# Altium PCB Brightside_Telemetry_pcb_rev2.PcbDoc (part 1 of 2)
Units mm, origin at the board's own origin, x right, y up, seen from the top; angles counter-clockwise.
Board outline 99.99 x 89.99 mm, 2 copper layers (Top Layer, Bottom Layer); 84 components, 55 nets, 357 pads, 109 vias.
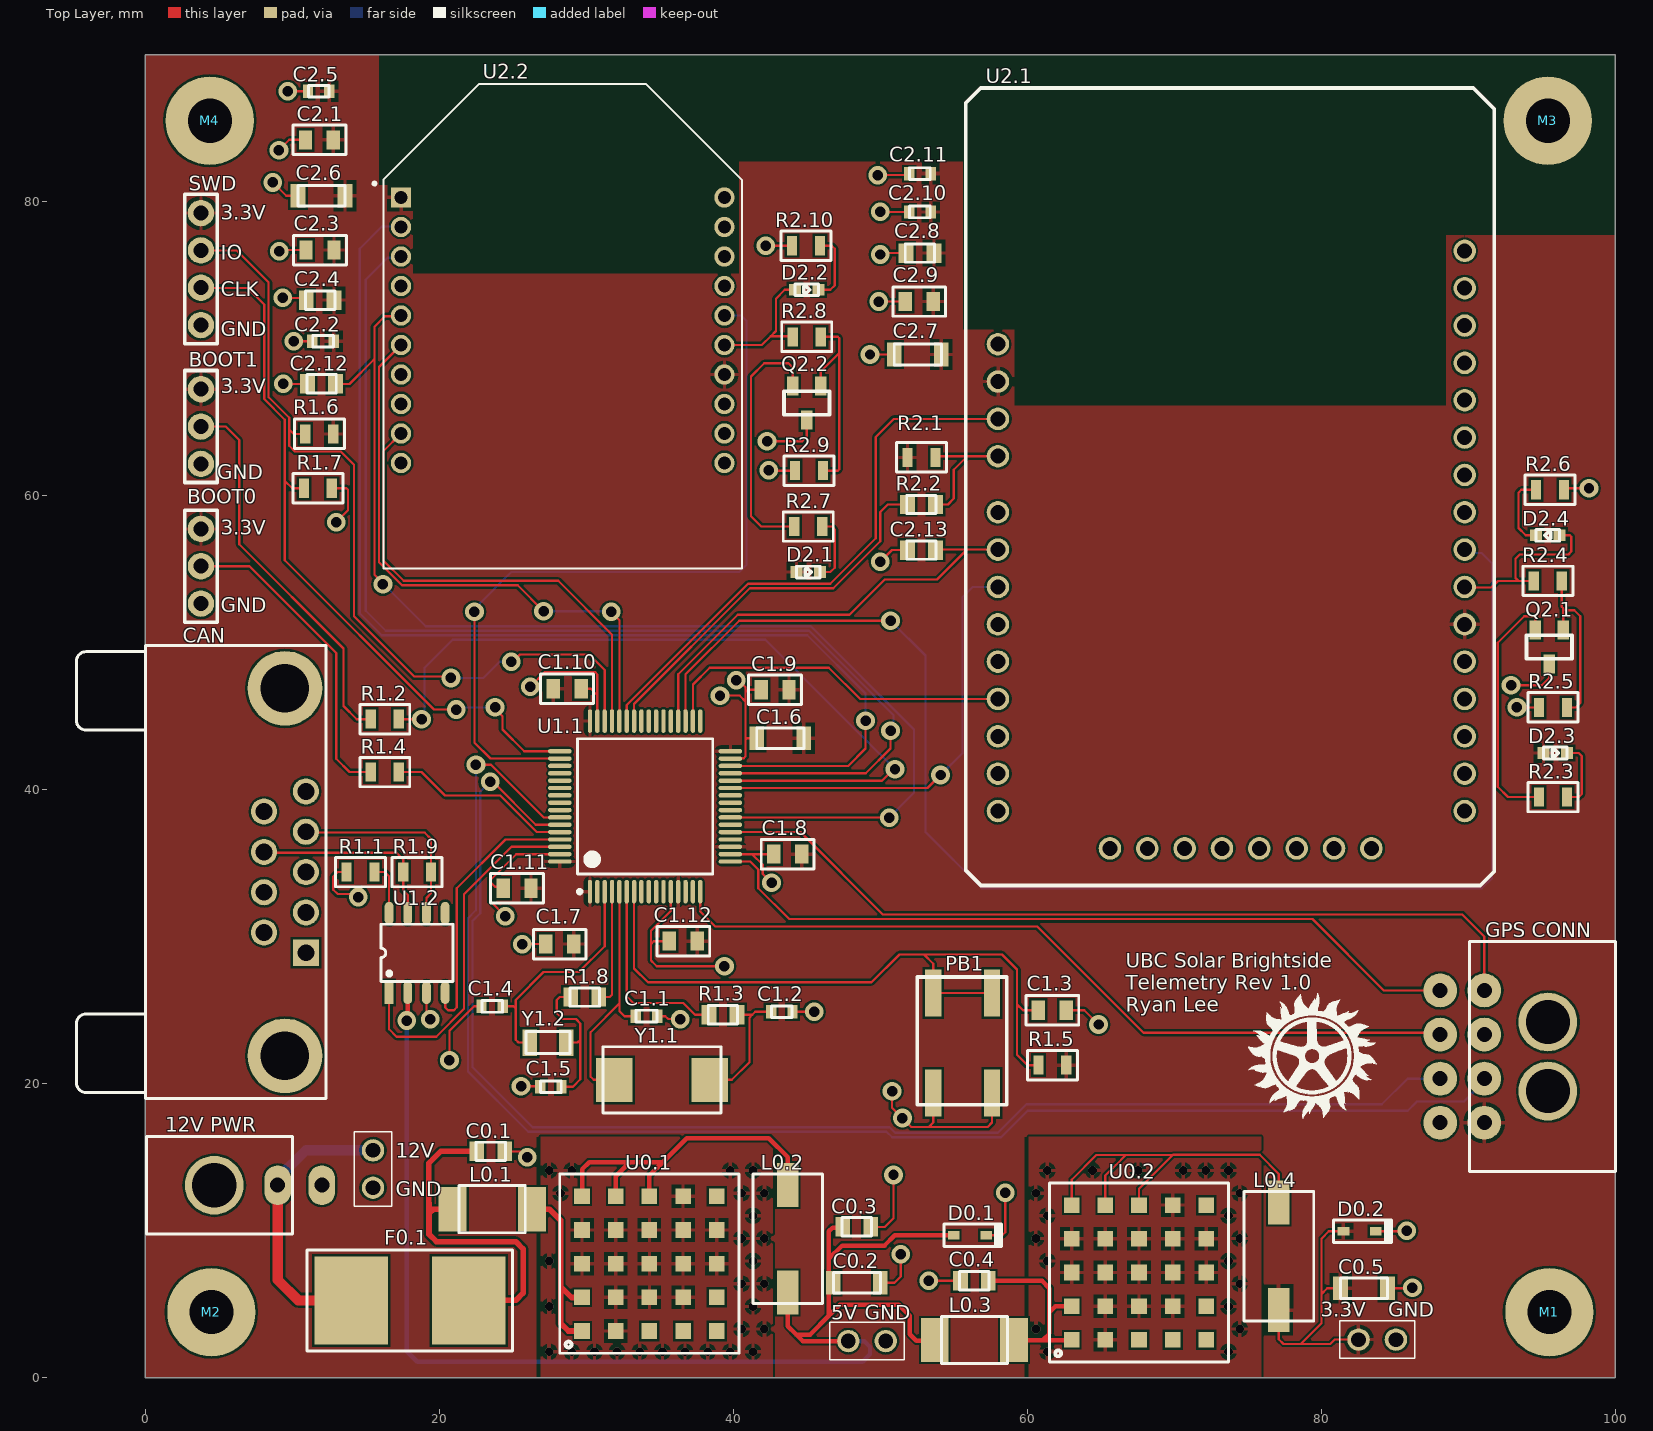
[diagram p0: Top Layer view]
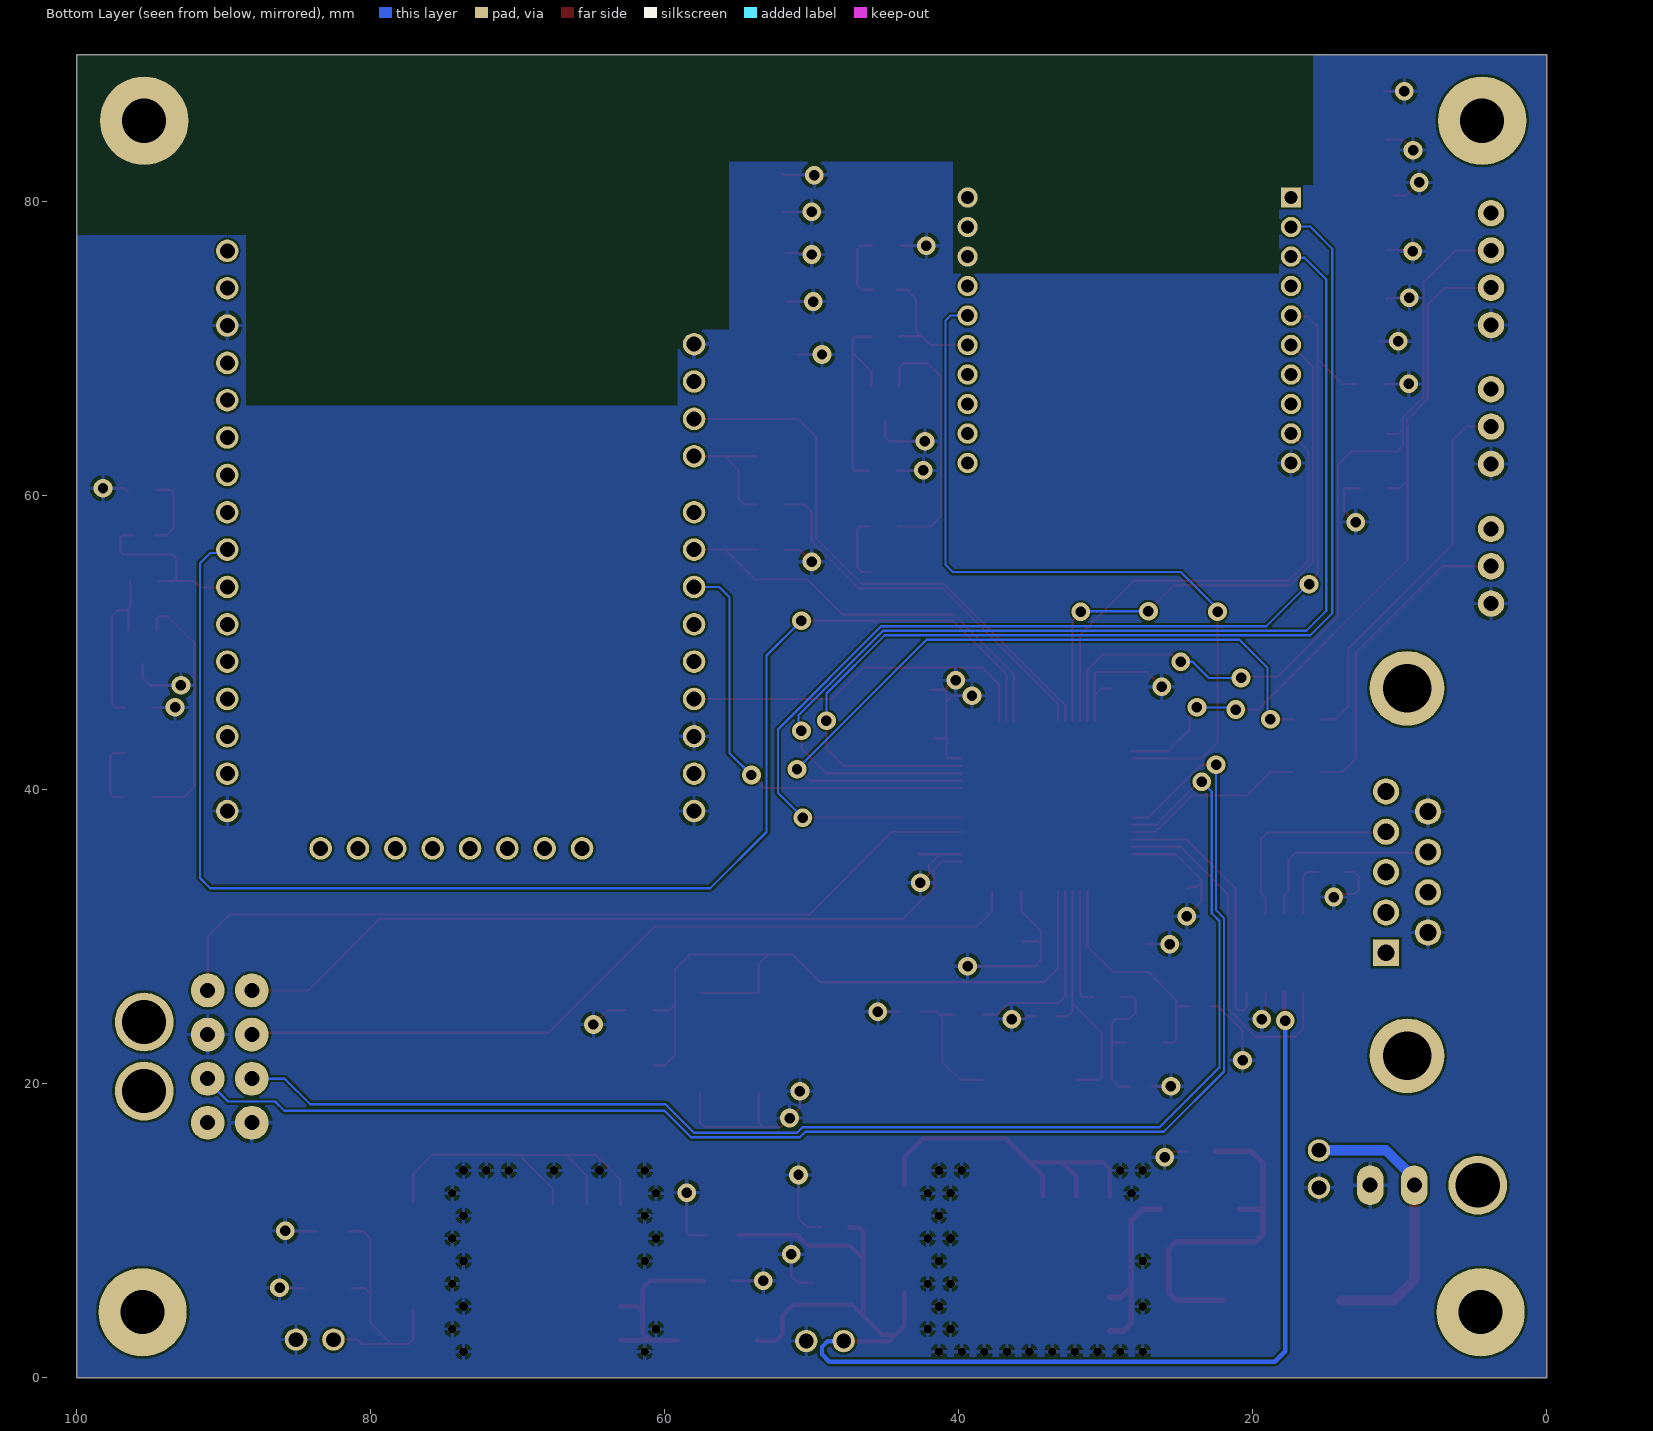
[diagram p1: Bottom Layer view, seen from below]
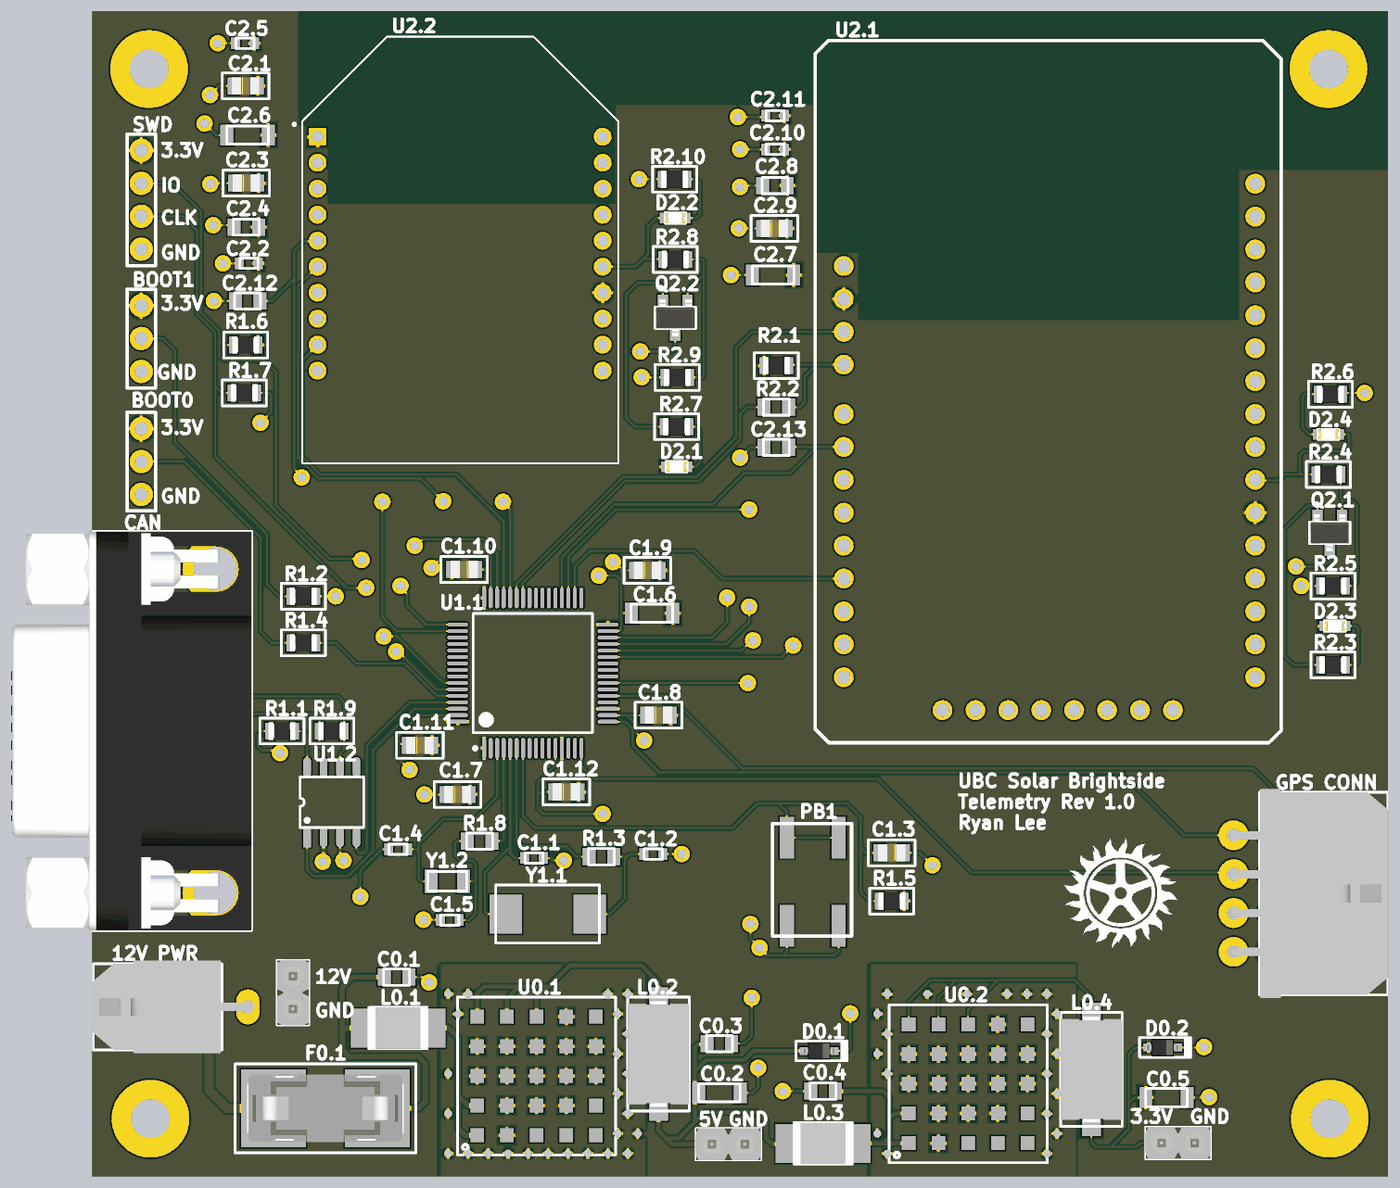
[diagram p2: 3D render of the assembled board from above, using the file's embedded part models]

## Layer stack, top to bottom
Top Solder: solder mask 0.0102, Solder Resist, Dk 3.5
Top Layer: signal copper 0.0356
Dielectric 1: dielectric 0.32, FR-4, Dk 4.8
Bottom Layer: signal copper 0.0356
Bottom Solder: solder mask 0.0102, Solder Resist, Dk 3.5

## Board outline
0,0 99.992,0 99.992,89.989 0,89.989

## Design rules (kind name [scope] priority, off if disabled: settings)
Clearance "Stitching No Net" [IsStitchingVia and InNet('No Net') vs (IsVia and (Not IsStitchingVia)) Or IsPad] p1: gap=0.127 ignorepadtopadclearanceinfootprint=FALSE
Clearance [All] p2: gap=0.152 ignorepadtopadclearanceinfootprint=FALSE
HoleSize [All] p1: absolutevalues=TRUE maxlimit=100 minlimit=0.4 maxpercent=80.000 minpercent=20.000
MinimumSolderMaskSliver [All] p1: minsoldermaskwidth=0
PolygonConnect [All] p1: connectstyle=Relief reliefconductorwidth=0.254 reliefentries=4 polygonreliefangle="90 Angle" airgapwidth=0.254
RoutingVias [All] p1: holewidth=0.4 width=0.8 viastyle="Through Hole" minholewidth=0.4 minwidth=0.6 maxholewidth=100 maxwidth=100
SilkToSilkClearance [All] p1: silktosilkclearance=0
SilkToSolderMaskClearance [IsPad] p1: minsilkscreentomaskgap=0 clearancetoexposedcopper=TRUE
SolderMaskExpansion [All] p1: expansion=0.102 istentingtop=FALSE
Width [All] p1: maxlimit=100 minlimit=0.152 preferedwidth=0.152
26 further rules are at their usual default settings.

## Classes and differential pairs
component class misc_comp: M1 M2 M3 M4
component class Brightside_Telemetry_stm_rev2: BOOT0 BOOT1 C1.1 C1.2 C1.3 C1.4 C1.5 C1.6 C1.7 C1.8 C1.9 C1.10 C1.11 C1.12 "GPS CONN" PB1 R1.1 R1.2 R1.3 R1.4 R1.5 R1.6 R1.7 R1.8 R1.9 SWD U1.1 U1.2 Y1.1 Y1.2
component class Brightside_Telemetry_RC_rev2: C2.1 C2.2 C2.3 C2.4 C2.5 C2.6 C2.7 C2.8 C2.9 C2.10 C2.11 C2.12 C2.13 D2.1 D2.2 D2.3 D2.4 Q2.1 Q2.2 R2.1 R2.2 R2.3 R2.4 R2.5 R2.6 R2.7 R2.8 R2.9 R2.10 U2.2
component class Brightside_Telemetry_power_rev2: C0.1 C0.2 C0.3 C0.4 C0.5 D0.1 D0.2 F0.1 L0.1 L0.2 L0.3 L0.4 U0.1 U0.2

## Components (designator, comment, footprint, x,y, rotation, side; value= is the part's Value field where it differs from the comment)
"12V PWR" "G881A02001TEU" "Micro-Fit 3.0 2pos" 9.014,13.1 r270 top (schematic designator J0.4)
BOOT0 "HDR" "0.1\" Header 3pos" 3.794,55.2 r270 top (schematic designator J1.3)
BOOT1 "HDR" "0.1\" Header 3pos" 3.794,64.7 r270 top (schematic designator J1.2)
C0.1 "0.01uF" 0805 23.494,15.4 r180 top
C0.2 "22uF" 1206 48.4,6.467 r180 top
C0.3 "0.01uF" 0805 48.4,10.267 r180 top
C0.4 "0.01uF" 0805 56.394,6.6 r0 top
C0.5 "22uF" 1206 82.894,6.1 r180 top
C1.1 "6pF" 0603 34.094,24.6 r0 top
C1.2 "6pF" 0603 43.294,24.9 r0 top
C1.3 "0.1uF" C0805 61.694,25 r180 top
C1.4 "4pF" 0603 23.6,25.267 r0 top
C1.5 "4pF" 0603 27.594,19.8 r0 top
C1.6 "1uF" 1206 43.194,43.5 r180 top
C1.7 "0.1uF" C0805 28.194,29.5 r0 top
C1.8 "0.1uF" C0805 43.7,35.617 r0 top
C1.9 "0.1uF" C0805 42.844,46.8 r0 top
C1.10 "0.1uF" C0805 28.7,46.867 r180 top
C1.11 "0.1uF" C0805 25.294,33.3 r0 top
C1.12 "0.1uF" C0805 36.594,29.7 r0 top
C2.1 "1uF" C0805 11.844,84.2 r0 top
C2.2 "8.3pf" 0603 12.094,70.5 r0 top
C2.3 "10uF" C0805 11.894,76.7 r0 top
C2.4 "0.1uF" 0805 11.894,73.3 r0 top
C2.5 "47pf" 0603 11.794,87.5 r180 top
C2.6 "100uf" 1206 11.994,80.4 r0 top
C2.7 "100uf" 1206 52.544,69.6 r0 top
C2.8 "0.1uF" 0805 52.694,76.5 r180 top
C2.9 "10uF" C0805 52.644,73.2 r0 top
C2.10 "47pf" 0603 52.694,79.3 r0 top
C2.11 "8.3pf" 0603 52.694,81.9 r0 top
C2.12 "0.01uF" 0805 11.994,67.6 r180 top
C2.13 "0.01uF" 0805 52.794,56.3 r0 top
CAN "A-DF09A/KG-T2S" "DB9 (FEMALE)" 9.504,34.4 r270 top (schematic designator J1.1)
D0.1 "TVS Diode 5V" SOD-323 56.094,9.7 r180 top
D0.2 "TVS Diode 3V3" SOD-323 82.6,9.967 r180 top
D2.1 "RED" "0603 LED" 45.094,54.8 r180 top
D2.2 "RED" "0603 LED" 44.994,74 r180 top
D2.3 "GREEN" "0603 LED" 95.894,42.5 r180 top
D2.4 "GREEN" "0603 LED" 95.394,57.3 r0 top
F0.1 "Fuseholder" "SCHURTER - 0031.7701.11 - FUSE HOLDER, PCB MOUNT" 18,5.267 r0 top
"GPS CONN" "10132449-0821GLF" "Micro-Fit 3.0 8pos" 91.074,21.85 r90 top (schematic designator J1.4)
J0.1 "1x2 HDR100" "Molex 0901200762" 15.494,14.2 r270 top
J0.2 "1x2 HDR100" "Molex 0901200762" 49.094,2.5 r0 top
J0.3 "1x2 HDR100" "Molex 0901200762" 83.794,2.6 r0 top
L0.1 "70" 1812 23.6,11.467 r0 top
L0.2 "98" 7427932 43.7,9.467 r270 top
L0.3 "70" 1812 56.4,2.567 r0 top
L0.4 "98" 7427932 77.1,8.267 r270 top
M1 "3mm Mounting Hole" "3mm Mounting Hole" 95.5,4.467 r90 top
M2 "3mm Mounting Hole" "3mm Mounting Hole" 4.5,4.467 r90 top
M3 "3mm Mounting Hole" "3mm Mounting Hole" 95.394,85.5 r90 top
M4 "3mm Mounting Hole" "3mm Mounting Hole" 4.394,85.5 r90 top
PB1 "P12961SCT-ND" P12961SCT-ND 53.6,26.167 r270 top
Q2.1 "BJT" SOT-23-3 95.494,49.7 r180 top
Q2.2 "BJT" SOT-23-3 44.994,66.3 r180 top
R1.1 "1k" R0805 14.644,34.4 r180 top
R1.2 "10K" R0805 16.294,44.8 r180 top
R1.3 "0" 0805 39.294,24.7 r0 top
R1.4 "10K" R0805 16.294,41.2 r180 top
R1.5 "10K" R0805 61.7,21.267 r0 top
R1.6 "10K" R0805 11.844,64.2 r180 top
R1.7 "10K" R0805 11.744,60.5 r180 top
R1.8 "0" 0805 29.894,25.9 r0 top
R1.9 "120 ohm" R0805 18.494,34.4 r180 top
R2.1 "1K" R0805 52.794,62.6 r180 top
R2.2 "0" 0805 52.794,59.4 r0 top
R2.3 "464" R0805 95.744,39.5 r0 top
R2.4 "10K" R0805 95.394,54.2 r0 top
R2.5 "10K" R0805 95.744,45.6 r0 top
R2.6 "1K" R0805 95.544,60.4 r180 top
R2.7 "464" R0805 45.094,57.9 r0 top
R2.8 "10K" R0805 44.994,70.8 r0 top
R2.9 "10K" R0805 45.144,61.7 r0 top
R2.10 "1K" R0805 44.944,77 r0 top
SWD "HDR" "0.1\" Header 4pos" 3.794,75.41 r90 top (schematic designator J1.5)
U0.1 "RPM5.0-3.0" 25-BLGA 34.29,7.767 r90 top
U0.2 "RPM3.3-3.0" 25-BLGA 67.59,7.167 r90 top
U1.1 "STM32F103RCT6_SingleBlock" 64-LQFP 34,38.867 r90 top
U1.2 "MCP2551-I/SN" 8-SOIC 18.494,28.9 r90 top
U2.1 "XBEE_SMD_ADAPTER" XBEE_RF_ADAPT 74.273,57.818 r0 top
U2.2 "XBP24CAUIT-001" XBEE_RF 28.394,71.4 r0 top
Y1.1 "8MHz" NX8045GB-8.000000MHZ 35.15,20.267 r180 top
Y1.2 "32kHz" "FC-135 32.7680KA-AG" 27.394,22.8 r0 top

## Footprints (in the part's own frame and the unit in brackets; to place one, negate y for a bottom-side part, rotate by r counter-clockwise, add the part's x,y. Pads: shape width x height; smd on the part's side, far side on the other; paste and mask are expansions set on the pad)
"0.1\" Header 3pos" [mm]
  round 1.8 hole 1.02: 1(-2.54,0) 2(0,0) 3(2.54,0)
  silkscreen extent -3.81,-1.1 3.81,1.1
"0.1\" Header 4pos" [mm]
  round 1.8 hole 1.02: 1(-3.81,0) 2(-1.27,0) 3(1.27,0) 4(3.81,0)
  silkscreen extent -5.08,-1.1 5.08,1.1
"3mm Mounting Hole" [mm]
  round 6 hole 3: 1(0,0)
8-SOIC [mm]
  rect 1.55x0.6 smd: 1(-2.7,1.905)
  oval 1.55x0.6 smd: 2(-2.7,0.635) 3(-2.7,-0.635) 4(-2.7,-1.905) 5(2.7,-1.905) 6(2.7,-0.635) 7(2.7,0.635) 8(2.7,1.905)
  silkscreen extent -1.95,-2.45 1.95,2.45
25-BLGA [mm]
  rect 1.06x1.06 smd: A1(-4.58,4.58) A2(-2.29,4.58) A3(0,4.58) A4(2.29,4.58) A5(4.58,4.58) B1(-4.58,2.29) B2(-2.29,2.29) B3(0,2.29) B4(2.29,2.29) B5(4.58,2.29) C1(-4.58,0) C2(-2.29,0) C3(0,0) C4(2.29,0) C5(4.58,0) D1(-4.58,-2.29) D2(-2.29,-2.29) D3(0,-2.29) D4(2.29,-2.29) D5(4.58,-2.29) E1(-4.58,-4.58) E2(-2.29,-4.58) E3(0,-4.58) E4(2.29,-4.58) E5(4.58,-4.58)
  silkscreen extent -6.09,-6.09 6.09,6.09
64-LQFP [mm]
  oval 1.6x0.3 smd: 1(-5.8,3.75) 2(-5.8,3.25) 3(-5.8,2.75) 4(-5.8,2.25) 5(-5.8,1.75) 6(-5.8,1.25) 7(-5.8,0.75) 8(-5.8,0.25) 9(-5.8,-0.25) 10(-5.8,-0.75) 11(-5.8,-1.25) 12(-5.8,-1.75) 13(-5.8,-2.25) 14(-5.8,-2.75) 15(-5.8,-3.25) 16(-5.8,-3.75) 33(5.8,-3.75) 34(5.8,-3.25) 35(5.8,-2.75) 36(5.8,-2.25) 37(5.8,-1.75) 38(5.8,-1.25) 39(5.8,-0.75) 40(5.8,-0.25) 41(5.8,0.25) 42(5.8,0.75) 43(5.8,1.25) 44(5.8,1.75) 45(5.8,2.25) 46(5.8,2.75) 47(5.8,3.25) 48(5.8,3.75)
  oval 0.3x1.6 smd: 17(-3.75,-5.8) 18(-3.25,-5.8) 19(-2.75,-5.8) 20(-2.25,-5.8) 21(-1.75,-5.8) 22(-1.25,-5.8) 23(-0.75,-5.8) 24(-0.25,-5.8) 25(0.25,-5.8) 26(0.75,-5.8) 27(1.25,-5.8) 28(1.75,-5.8) 29(2.25,-5.8) 30(2.75,-5.8) 31(3.25,-5.8) 32(3.75,-5.8) 49(3.75,5.8) 50(3.25,5.8) 51(2.75,5.8) 52(2.25,5.8) 53(1.75,5.8) 54(1.25,5.8) 55(0.75,5.8) 56(0.25,5.8) 57(-0.25,5.8) 58(-0.75,5.8) 59(-1.25,5.8) 60(-1.75,5.8) 61(-2.25,5.8) 62(-2.75,5.8) 63(-3.25,5.8) 64(-3.75,5.8)
  silkscreen extent -5.92,-4.6 4.6,4.6, body extent -5,-5 5,5, height 1.6
0603 [mm]
  rect 0.7x0.9 smd: 1(-0.725,0) 2(0.725,0)
  silkscreen extent -0.7,-0.4 0.7,0.4
"0603 LED" [mm]
  rect 0.8x0.8 smd: 1(-0.8,0) 2(0.8,0)
  silkscreen extent -0.8,-0.4 0.8,0.4, body extent -0.8,-0.4 0.8,0.4, height 0.7
0805 [mm]
  rect 1x1.32 smd: 1(-0.95,0) 2(0.95,0)
  silkscreen extent -1,-0.63 1,0.63
1206 [mm]
  rect 1x1.6 smd: 1(-1.6,0) 2(1.6,0)
  silkscreen extent -1.6,-0.7 1.6,0.7
1812 [mm]
  rect 1.9x3 smd: 1(-2.7,0) 2(2.7,0)
  silkscreen extent -2.25,-1.6 2.25,1.6, body extent -2.25,-1.6 2.25,1.6, height 1.51
7427932 [mm]
  rect 3x1.47 smd: 1(-3.65,0) 2(3.65,0)
  silkscreen extent -4.4,-2.37 4.4,2.37, body extent -4.1,-2.38 4.1,2.37, height 3.21
C0805 [mm]
  rect 0.9x1.3 smd: 1(-0.95,0) 2(0.95,0)
  silkscreen extent -1.8,-1 1.8,1, body extent -1.05,-0.67 1.05,0.67, height 0.94
"DB9 (FEMALE)" [mil]
  rect 70x70 hole 45: 1(216,56)
  round 70 hole 45: 2(108,56) 3(0,56) 4(-108,56) 5(-216,56) 6(162,-56) 7(54,-56) 8(-54,-56) 9(-162,-56)
  round 200 hole 130: G1(492,0) G2(-492,0)
  silkscreen extent -606,-558 606,110, body extent -606,-620 606,110, height 493
"FC-135 32.7680KA-AG" [mm]
  rect 1x1.8 smd: 1(-1.25,0) 2(1.25,0)
  silkscreen extent -1.5,-0.75 1.5,0.75
"Micro-Fit 3.0 2pos" [mm]
  oval 2.7x1.8 hole 1.02: 1(0,0) 2(0,3)
  round 4 hole 3: ""(0,-4.32)
  silkscreen extent -3.32,-8.92 3.32,1, body extent -3.58,-9 3.58,3.24, height 8.78
"Micro-Fit 3.0 8pos" [mm]
  round 2.3 hole 1.02: 1(4.5,0) 2(1.5,0) 3(-1.5,0) 4(-4.5,0) 5(4.5,3) 6(1.5,3) 7(-1.5,3) 8(-4.5,3)
  round 4 hole 3: ""(-2.35,-4.32) ""(2.35,-4.32)
  silkscreen extent -7.83,-8.92 7.83,1, body extent -8.07,-8.95 8.08,3.29, height 8.78
"Molex 0901200762" [mil]
  round 60 hole 39.37: 1(-50,0) 2(50,0)
  silkscreen extent -100,-50 100,50, body extent -100,-49 100,49, height 365
NX8045GB-8.000000MHZ [mm]
  rect 2.5x3 smd: 1(-3.25,0) 2(3.25,0)
  silkscreen extent -4,-2.25 4,2.25
P12961SCT-ND [mm]
  rect 3.2x1.1 smd: 1(0,0) 2(6.8,0) 3(0,4) 4(6.8,4)
  silkscreen extent -1.1,-1.1 7.6,5
R0805 [mm]
  rect 0.7x1.3 smd: 1(-0.95,0) 2(0.95,0)
  silkscreen extent -1.7,-1 1.7,1, body extent -1.05,-0.67 1.05,0.68, height 0.6
"SCHURTER - 0031.7701.11 - FUSE HOLDER, PCB MOUNT" [mm]
  rect 5x6 smd: 1(-4,0) 2(4,0)
  silkscreen extent -6.98,-3.43 6.99,3.43, body extent -6.04,-2.6 6.04,2.6, height 6.01
SOD-323 [mm] "SOD, 2-Leads, Body 1.7x1.25mm"
  rect 0.8x0.6 smd: 1(-1.1,0) 2(1.1,0)
  silkscreen extent -2.16,-0.76 1.78,0.76, body extent -1.3,-0.67 1.3,0.68, height 1.1
SOT-23-3 [mm]
  rect 0.8x1.3 smd: 1(-0.95,-1.15) 2(0.95,-1.15) 3(0,1.15)
  silkscreen extent -1.55,-0.8 1.55,0.8, body extent -1.5,-1.42 1.5,1.42, height 1.2
XBEE_RF [mil]
  rect 54.25x54.25 hole 34.25: 1(-433,349.5)
  round 54.25 hole 34.25: 2(-433,270.5) 3(-433,191.5) 4(-433,112.5) 5(-433,33.5) 6(-433,-45.5) 7(-433,-124.5) 8(-433,-203.5) 9(-433,-282.5) 10(-433,-361.5) 11(433,-361.5) 12(433,-282.5) 13(433,-203.5) 14(433,-124.5) 15(433,-45.5) 16(433,33.5) 17(433,112.5) 18(433,191.5) 19(433,270.5) 20(433,349.5)
  silkscreen extent -508,-644 480,654
XBEE_RF_ADAPT [mm]
  round 1.53 / inner round 1.524 / far side round 1.53 hole 1.02: 1(-16.279,12.482) 2(-16.279,9.942) 3(-16.279,7.402) 4(-16.279,4.862) 5(-16.279,1.052) 6(-16.279,-1.488) 7(-16.279,-4.028) 8(-16.279,-6.568) 9(-16.279,-9.108) 10(-16.279,-11.648) 11(-16.279,-14.188) 12(-16.279,-16.728) 13(-16.279,-19.268) 14(-8.659,-21.808) 15(-6.119,-21.808) 16(-3.579,-21.808) 17(-1.039,-21.808) 18(1.501,-21.808) 19(4.041,-21.808) 20(6.581,-21.808) 21(9.121,-21.808) 22(15.471,-19.268) 23(15.471,-16.728) 24(15.471,-14.188) 25(15.471,-11.648) 26(15.471,-9.108) 27(15.471,-6.568) 28(15.471,-4.028) 29(15.471,-1.488) 30(15.471,1.052) 31(15.471,3.592) 32(15.471,6.132) 33(15.471,8.672) 34(15.471,11.212) 35(15.471,13.752) 36(15.471,16.292) 37(15.471,18.832)
  silkscreen extent -18.47,-24.33 17.47,29.9

## Part data
"12V PWR": "Micro-fit 3.0 2pos right-angle", Color=Black, Contact Resistance=10mR, Flammability Rating="UL94 V-0", Manufacturer=Molex, Manufacturer Part Number=0430450200, Max Operating Temperature=105°C, Max Voltage Rating (AC)=250V, Min Operating Temperature=-40°C, Supplier Part Number 1=WM1813-ND, Category="Headers and Wire Housings", ComponentLink1Description=https://datasheet.ciiva.com/712/430450200-sd-712017.pdf?src-supplier=Digi-Key, ComponentLink1URL=https://datasheet.ciiva.com/712/430450200-sd-712017.pdf?src-supplier=Digi-Key, ComponentLink2Description=https://datasheet.ciiva.com/3933/159670430450200-pcb-headers-3933176.pdf?src-supplier=Arrow, ComponentLink2URL=https://datasheet.ciiva.com/3933/159670430450200-pcb-headers-3933176.pdf?src-supplier=Arrow, Connector Type="Male Pin", Contact Material=Brass, Contact Plating=Tin, Depth=12.2mm, Fastening Type=Ramp, Housing Color=Black, Housing Material=Polymer, Length=7.15mm, Mount="Through Hole", Number of Contacts=2, Number of Positions=2, Number of Rows=2, Orientation="Right Angle", Packaging=Tray, Pitch=3mm, RoHS=Yes, Row Spacing=0.118inch, Stock 1=9248, Supplier 1=Digi-Key, Termination=Solder
BOOT0 BOOT1: library part "0.1\" Header 3pos"
C0.1 C0.3 C0.4 C2.12 C2.13: library part C0805C103K1RAC7210, "Cap Ceramic 0.01uF 100V X7R 10% SMD 0805 125C T/R", Capacitance=10nF, Case Code (Imperial)=0805, Case Code (Metric)=2012, Dielectric=X7R, Dielectric Material=Ceramic, Manufacturer=KEMET, Max Operating Temperature=125°C, Min Operating Temperature=-55°C, Package Quantity=10000, Supplier Part Number 1=399-17617-1-ND, Tolerance=10%, Voltage Rating=100V, Case/Package=0805, Category="Ceramic Capacitors", ComponentLink1Description=http://www.mouser.com/ds/2/212/KEM_C1002_X7R_SMD-1102033.pdf?src-supplier=Mouser, ComponentLink1URL=http://www.mouser.com/ds/2/212/KEM_C1002_X7R_SMD-1102033.pdf?src-supplier=Mouser, ComponentLink2Description=https://www.verical.com/server-webapp/html/getDatasheet?partID=131027&src-supplier=Verical, ComponentLink2URL=https://www.verical.com/server-webapp/html/getDatasheet?partID=131027&src-supplier=Verical, ComponentLink3Description=http://components.arrow.com/part/dataview/0323_00324583?src-supplier=Arrow+Europe, ComponentLink3URL=http://components.arrow.com/part/dataview/0323_00324583?src-supplier=Arrow+Europe, ComponentLink4Description=http://www.farnell.com/datasheets/2747800.pdf?src-supplier=Farnell, ComponentLink4URL=http://www.farnell.com/datasheets/2747800.pdf?src-supplier=Farnell, ComponentLink5Description=http://components.arrow.com/part/dataview/2091052S6675795N7429?src-supplier=Arrow, ComponentLink5URL=http://components.arrow.com/part/dataview/2091052S6675795N7429?src-supplier=Arrow, ComponentLink6Description=http://www.farnell.com/datasheets/2747800.pdf?src-supplier=Newark, ComponentLink6URL=http://www.farnell.com/datasheets/2747800.pdf?src-supplier=Newark, ComponentLink7Description=http://www.kemet.com/kemet/web/homepage/kechome.nsf/weben/C4DA2DA1D1C9D3C3CA2570A50016092D/$file/KEM_C1002_X7R_SMD.pdf?src-supplier=Avnet+Europe, ComponentLink7URL=http://www.kemet.com/kemet/web/homepage/kechome.nsf/weben/C4DA2DA1D1C9D3C3CA2570A50016092D/$file/KEM_C1002_X7R_SMD.pdf?src-supplier=Avnet+Europe, ComponentLink8Description=http://www.kemet.com/kemet/web/homepage/kechome.nsf/weben/C4DA2DA1D1C9D3C3CA2570A50016092D/$file/KEM_C1002_X7R_SMD.pdf?src-supplier=Avnet, ComponentLink8URL=http://www.kemet.com/kemet/web/homepage/kechome.nsf/weben/C4DA2DA1D1C9D3C3CA2570A50016092D/$file/KEM_C1002_X7R_SMD.pdf?src-supplier=Avnet, ComponentLink9Description=https://api.kemet.com/component-edge/download/datasheet/C0805C103K1RAC7210.pdf?src-supplier=Digi-Key, ComponentLink9URL=https://api.kemet.com/component-edge/download/datasheet/C0805C103K1RAC7210.pdf?src-supplier=Digi-Key, Depth=1.25mm, Height=0.78mm, Length=2mm, Manufacturer Part Number=C0805C103K1RAC7210, Mount="Surface Mount", Packaging="Tape and Reel", Radiation Hardening=No, RoHS=Yes, Stock 1=43378, Supplier 1=Digi-Key, Termination=SMD/SMT, Voltage Rating (DC)=100V
C0.2 C0.5: library part CL31B226KPHNNNE, "CAP CER 22UF 10V X7R 1206", Case Code (Imperial)=1206, Case Code (Metric)=3216, Dielectric=X7R, Manufacturer=Samsung, Max Operating Temperature=125°C, Min Operating Temperature=-55°C, Package Quantity=2000, Supplier Part Number 1=1276-2769-1-ND, Tolerance=10%, Voltage Rating=10V, Capacitance=22uF, Case/Package=1206, Category="Ceramic Capacitors", ComponentLink1Description=https://datasheet.ciiva.com/25724/cl31b226kphnnne-25724443.pdf?src-supplier=Digi-Key, ComponentLink1URL=https://datasheet.ciiva.com/25724/cl31b226kphnnne-25724443.pdf?src-supplier=Digi-Key, ComponentLink2Description=https://datasheet.ciiva.com/16384/cl31b226kphnnne-16384588.pdf?src-supplier=Future+Electronics, ComponentLink2URL=https://datasheet.ciiva.com/16384/cl31b226kphnnne-16384588.pdf?src-supplier=Future+Electronics, ComponentLink3Description=https://datasheet.ciiva.com/26838/getdatasheetpartid-710483-26838941.pdf?src-supplier=Verical, ComponentLink3URL=https://datasheet.ciiva.com/26838/getdatasheetpartid-710483-26838941.pdf?src-supplier=Verical, Contact Plating=Tin, Depth=1.6mm, Lead Free="Lead Free", Length=3.2mm, Manufacturer Part Number=CL31B226KPHNNNE, Mount="Surface Mount", Packaging="Tape and Reel", Radiation Hardening=No, RoHS=Yes, Stock 1=617814, Supplier 1=Digi-Key, Termination=Wraparound, Thickness=0.071inch, Voltage Rating (DC)=10V, Width=0.063inch
C1.1 C1.2: library part CC0603DRNPO9BN6R0, "CAP CER 6PF 50V C0G/NPO 0603", Case Code (Imperial)=0603, Case Code (Metric)=1608, Dielectric=C0G, Manufacturer=Yageo, Max Operating Temperature=125°C, Min Operating Temperature=-55°C, Package Quantity=1, Supplier Part Number 1=311-1055-1-ND, Voltage Rating=50V, Capacitance=6pF, Case/Package=0603, Category="Ceramic Capacitors", ComponentLink1Description=https://datasheet.ciiva.com/145/mlccorderingcode-145158.pdf?src-supplier=Digi-Key, ComponentLink1URL=https://datasheet.ciiva.com/145/mlccorderingcode-145158.pdf?src-supplier=Digi-Key, ComponentLink2Description=https://datasheet.ciiva.com/145/mlccorderingcode-145159.pdf?src-supplier=Digi-Key, ComponentLink2URL=https://datasheet.ciiva.com/145/mlccorderingcode-145159.pdf?src-supplier=Digi-Key, ComponentLink3Description=https://datasheet.ciiva.com/145/mlccorderingcode-145160.pdf?src-supplier=Digi-Key, ComponentLink3URL=https://datasheet.ciiva.com/145/mlccorderingcode-145160.pdf?src-supplier=Digi-Key, Composition=Ceramic, Depth=0.8mm, Lead Free="Lead Free", Length=1.6mm, Manufacturer Part Number=CC0603DRNPO9BN6R0, Mount="Surface Mount", Packaging="Tape and Reel", RoHS=Yes, Stock 1=25117, Supplier 1=Digi-Key, Termination=SMD/SMT, Thickness=0.035inch, Voltage Rating (DC)=50V, Weight=7.1E-05oz, Width=0.8mm
C1.3 C1.7 C1.8 C1.9 C1.10 C1.11 C1.12: library part CL21B104KBCWPNC, "CAP CER 0.1UF 50V X7R 0805", Capacitance=100nF, Case Code (Imperial)=0805, Case Code (Metric)=2012, Manufacturer=Samsung, Max Operating Temperature=125°C, Min Operating Temperature=-55°C, Ratings=AEC-Q200, Supplier Part Number 1=1276-6557-1-ND, Tolerance=10%, Voltage Rating=50V, Case/Package=0805, Category=Capacitors, Features="Soft Termination", Length=0.079inch, Manufacturer Part Number=CL21B104KBCWPNC, Mount="Surface Mount", Packaging="Tape and Reel", Pricing 1="1 = 0.10000, 10 = 0.06700, 100 = 0.02990, 500 = 0.02138, 1000 = 0.01680 (USD)", RoHS=Yes, Stock 1=6545, Supplier 1=Digi-Key, Thickness=0.053inch, Width=0.049inch
C1.4 C1.5: library part CC0603CRNPO9BN4R0, "CAP CER 4PF 50V C0G/NPO 0603", Case Code (Imperial)=0603, Case Code (Metric)=1608, Dielectric=C0G, Insulation Resistance=10GR, Manufacturer=Yageo, Max Operating Temperature=125°C, Min Operating Temperature=-55°C, Package Quantity=1, Supplier Part Number 1=311-1053-1-ND, Voltage Rating=50V, Capacitance=4pF, Case/Package=0603, Category="Ceramic Capacitors", ComponentLink1Description=https://datasheet.ciiva.com/145/mlccorderingcode-145161.pdf?src-supplier=Digi-Key, ComponentLink1URL=https://datasheet.ciiva.com/145/mlccorderingcode-145161.pdf?src-supplier=Digi-Key, ComponentLink2Description=https://datasheet.ciiva.com/145/mlccorderingcode-145162.pdf?src-supplier=Digi-Key, ComponentLink2URL=https://datasheet.ciiva.com/145/mlccorderingcode-145162.pdf?src-supplier=Digi-Key, ComponentLink3Description=https://datasheet.ciiva.com/145/mlccorderingcode-145163.pdf?src-supplier=Digi-Key, ComponentLink3URL=https://datasheet.ciiva.com/145/mlccorderingcode-145163.pdf?src-supplier=Digi-Key, Composition=Ceramic, Depth=0.8mm, Lead Free="Lead Free", Length=1.6mm, Manufacturer Part Number=CC0603CRNPO9BN4R0, Mount="Surface Mount", Number of Pins=2, Packaging="Tape and Reel", RoHS=Yes, Stock 1=1954, Supplier 1=Digi-Key, Termination=SMD/SMT, Thickness=0.035inch, Voltage Rating (DC)=50V, Weight=7.1E-05oz, Width=0.8mm
C1.6: library part 885012208036, "CAP CER 1UF 16V X7R 1206", Case Code (Imperial)=1206, Case Code (Metric)=3216, Manufacturer="Wurth Electronics", Max Operating Temperature=125°C, Min Operating Temperature=-55°C, Supplier Part Number 1=732-7692-1-ND, Tolerance=10%, Voltage Rating=16V, Capacitance=1uF, Case/Package=1206, Category="Ceramic Capacitors", ComponentLink1Description=http://katalog.we-online.de/pbs/datasheet/885012208036.pdf?src-supplier=Digi-Key, ComponentLink1URL=http://katalog.we-online.de/pbs/datasheet/885012208036.pdf?src-supplier=Digi-Key, ComponentLink2Description=https://katalog.we-online.de/pbs/datasheet/885012208036.pdf?src-supplier=Digi-Key, ComponentLink2URL=https://katalog.we-online.de/pbs/datasheet/885012208036.pdf?src-supplier=Digi-Key, Length=0.126inch, Manufacturer Part Number=885012208036, Mount="Surface Mount", Packaging="Tape and Reel", RoHS=Yes, Stock 1=2993, Supplier 1=Digi-Key, Thickness=0.051inch, Width=0.063inch
C2.1: library part CL21B105KAFNNNE, "Cap Ceramic 1uF 25V X7R 10% SMD 0805 125C T/R", Case Code (Imperial)=0805, Case Code (Metric)=2012, Dielectric=X7R, Manufacturer=Samsung, Max Operating Temperature=125°C, Min Operating Temperature=-55°C, Package Quantity=1, Supplier Part Number 1=1276-1066-1-ND, Tolerance=10%, Voltage=25V, Capacitance=1uF, Case/Package=0805, Category=Capacitors, ComponentLink1Description=https://datasheet.ciiva.com/25800/cl21b105kafnnne-25800163.pdf?src-supplier=Digi-Key, ComponentLink1URL=https://datasheet.ciiva.com/25800/cl21b105kafnnne-25800163.pdf?src-supplier=Digi-Key, ComponentLink2Description=https://datasheet.ciiva.com/15195/getdatasheetpartid-355205-15195880.pdf?src-supplier=Verical, ComponentLink2URL=https://datasheet.ciiva.com/15195/getdatasheetpartid-355205-15195880.pdf?src-supplier=Verical, Contact Plating=Tin, Depth=1.25mm, Height=1.25mm, Lead Free="Lead Free", Length=2mm, Manufacturer Part Number=CL21B105KAFNNNE, Mount="Surface Mount", Packaging="Tape and Reel", Pricing 1="1 = 0.10000, 10 = 0.07600, 100 = 0.03380, 500 = 0.02416, 1000 = 0.01898 (USD)", Radiation Hardening=No, RoHS=Yes, Stock 1=1606570, Supplier 1=Digi-Key, Thickness=0.053inch, Voltage Rating=25V, Voltage Rating (DC)=25V, Width=0.049inch
C2.2 C2.11: library part CBR06C839BAGAC, "CAP CER RF 8.3PF 250V +/-0.1 PF", Manufacturer=KEMET, Supplier Part Number 1=399-16262-1-ND, Category="Ceramic Capacitors", Manufacturer Part Number=CBR06C839BAGAC, Pricing 1="1=0.93000, 10=0.68500, 100=0.46970, 500=0.37184, 1000=0.31312 (USD)", RoHS=No, Stock 1=2499, Supplier 1=Digi-Key
C2.3 C2.9: library part C0805C106K8PACTU, "CAP CER 10UF 10V X5R 0805", Capacitance=1uF, Case Code (Imperial)=0805, Case Code (Metric)=2012, Dielectric=X7R, Manufacturer=Samsung, Manufacturer Part Number=CL21B105KAFNNNE, Max Operating Temperature=125°C, Min Operating Temperature=-55°C, Package Quantity=1, Supplier Part Number 1=399-4925-1-ND, Tolerance=10%, Voltage=25V, Case/Package=0805, Category=Capacitors, ComponentLink1Description=https://www.digikey.ca/product-detail/en/kemet/C0805C106K8PACTU/399-4925-1-ND/1090920, ComponentLink1URL=https://www.digikey.ca/product-detail/en/kemet/C0805C106K8PACTU/399-4925-1-ND/1090920, Contact Plating=Tin, Depth=1.25mm, Height=1.25mm, Lead Free="Lead Free", Length=2mm, Mount="Surface Mount", Packaging="Tape and Reel", Radiation Hardening=No, RoHS=Yes, Supplier 1=Digi-Key, Thickness=0.053inch, Voltage Rating=25V, Voltage Rating (DC)=25V, Width=0.049inch
C2.4 C2.8: library part CL21B104MBCNNNC, "Cap Ceramic 0.1uF 50V X7R 20% SMD 0805 125C Paper T/R", Capacitance=100nF, Case Code (Imperial)=0805, Case Code (Metric)=2012, Dielectric=X7R, Manufacturer=Samsung, Max Operating Temperature=125°C, Min Operating Temperature=-55°C, Package Quantity=1, Supplier Part Number 1=82AC9432, Tolerance=20%, Voltage=50V, Case/Package=0805, Category="Ceramic Capacitors", ComponentLink1Description=https://datasheet.ciiva.com/16428/cl21b104mbcnnnc-16428869.pdf?src-supplier=Future+Electronics, ComponentLink1URL=https://datasheet.ciiva.com/16428/cl21b104mbcnnnc-16428869.pdf?src-supplier=Future+Electronics, ComponentLink2Description=https://datasheet.ciiva.com/26838/getdatasheetpartid-746552-26838664.pdf?src-supplier=Verical, ComponentLink2URL=https://datasheet.ciiva.com/26838/getdatasheetpartid-746552-26838664.pdf?src-supplier=Verical, ComponentLink3Description=https://datasheet.ciiva.com/25780/cl21b104mbcnnnc-25780224.pdf?src-supplier=Digi-Key, ComponentLink3URL=https://datasheet.ciiva.com/25780/cl21b104mbcnnnc-25780224.pdf?src-supplier=Digi-Key, Depth=1.25mm, Height=0.85mm, Lead Free="Lead Free", Length=2mm, Manufacturer Part Number=CL21B104MBCNNNC, Mount="Surface Mount", Packaging="Tape and Reel", Pricing 1="4000=0.01100, 8000=0.01000 (CAD)", Radiation Hardening=No, RoHS=Yes, Stock 1=64000, Supplier 1=Newark, Thickness=0.037inch, Voltage Rating=50V, Voltage Rating (DC)=50V, Width=0.049inch
C2.5 C2.10: library part C0603C470J1GACTU, "CAP CER 47PF 100V C0G/NP0 0603", Capacitance=47pF, Case Code (Imperial)=0603, Case Code (Metric)=1608, Dielectric=C0G, Dielectric Material=Ceramic, Manufacturer=KEMET, Max Operating Temperature=125°C, Min Operating Temperature=-55°C, Package Quantity=4000, Supplier Part Number 1=399-7917-1-ND, Temperature Coefficient=30ppm/°C, Tolerance=5%, Voltage=100V, Case/Package=0603, Category="Ceramic Capacitors", ComponentLink1Description=https://datasheet.ciiva.com/28668/1789732-28668693.pdf?src-supplier=Element14, ComponentLink1URL=https://datasheet.ciiva.com/28668/1789732-28668693.pdf?src-supplier=Element14, ComponentLink2Description=https://datasheet.ciiva.com/18193/getdatasheetpartid-544691-18193046.pdf?src-supplier=Verical, ComponentLink2URL=https://datasheet.ciiva.com/18193/getdatasheetpartid-544691-18193046.pdf?src-supplier=Verical, ComponentLink3Description=https://datasheet.ciiva.com/18101/getdatasheetpartid-38001-18101098.pdf?src-supplier=Verical, ComponentLink3URL=https://datasheet.ciiva.com/18101/getdatasheetpartid-38001-18101098.pdf?src-supplier=Verical, Depth=0.8mm, Dissipation Factor=0.1%, Height=0.8mm, Lead Free="Lead Free", Lead Pitch=0.7mm, Length=1.6mm, Manufacturer Part Number=C0603C470J1GACTU, Mount="Surface Mount,PCB", Number of Pins=2, Packaging="Tape and Reel", Pricing 1="1=0.10000, 10=0.06000, 100=0.02670, 500=0.01906, 1000=0.01497 (USD)", Radiation Hardening=No, REACH SVHC="No SVHC", RoHS=Yes, Stock 1=141401, Supplier 1=Digi-Key, Termination=SMD/SMT, Thickness=0.034inch, Voltage Rating=100V, Voltage Rating (DC)=100V, Width=0.8mm
C2.6 C2.7: library part GRM21BR60G107ME15L, "Cap Ceramic 100uF 6.3V X5R 20% SMD 1206 85°C Embossed T/R", Capacitance=100uF, Case Code (Imperial)=0805, Case Code (Metric)=2012, Dielectric=X5R, Dielectric Material=Ceramic, Manufacturer=Murata, Max Operating Temperature=85°C, Min Operating Temperature=-55°C, Package Quantity=3000, Supplier Part Number 1=490-10510-1-ND, Tolerance=20%, Voltage=4V, Case/Package=0805, Category="Ceramic Capacitors", ComponentLink1Description=http://www.farnell.com/datasheets/2079181.pdf?src-supplier=Farnell, ComponentLink1URL=http://www.farnell.com/datasheets/2079181.pdf?src-supplier=Farnell, ComponentLink2Description=http://www.mouser.com/ds/2/281/c02e-2905.pdf?src-supplier=Mouser, ComponentLink2URL=http://www.mouser.com/ds/2/281/c02e-2905.pdf?src-supplier=Mouser, ComponentLink3Description=http://psearch.en.murata.com/capacitor/product/GRM21BR60G107ME15%23.pdf?src-supplier=Avnet, ComponentLink3URL=http://psearch.en.murata.com/capacitor/product/GRM21BR60G107ME15%23.pdf?src-supplier=Avnet, ComponentLink4Description=http://www.farnell.com/datasheets/2079181.pdf?src-supplier=Element14, ComponentLink4URL=http://www.farnell.com/datasheets/2079181.pdf?src-supplier=Element14, ComponentLink5Description=https://search.murata.co.jp/Ceramy/image/img/A01X/partnumbering_e_01.pdf?src-supplier=Digi-Key, ComponentLink5URL=https://search.murata.co.jp/Ceramy/image/img/A01X/partnumbering_e_01.pdf?src-supplier=Digi-Key, ComponentLink6Description=http://www.farnell.com/datasheets/2079181.pdf?src-supplier=Newark, ComponentLink6URL=http://www.farnell.com/datasheets/2079181.pdf?src-supplier=Newark, ComponentLink7Description=https://datasheet.ciiva.com/5418/product-5418275.pdf?src-supplier=Mouser, ComponentLink7URL=https://datasheet.ciiva.com/5418/product-5418275.pdf?src-supplier=Mouser, ComponentLink8Description=https://datasheet.ciiva.com/15027/product-15027946.pdf?src-supplier=Digi-Key, ComponentLink8URL=https://datasheet.ciiva.com/15027/product-15027946.pdf?src-supplier=Digi-Key, ComponentLink9Description=https://datasheet.ciiva.com/15027/product-15027947.pdf?src-supplier=Digi-Key, ComponentLink9URL=https://datasheet.ciiva.com/15027/product-15027947.pdf?src-supplier=Digi-Key, ComponentLink10Description=https://datasheet.ciiva.com/25723/cl31a107mqhnnne-25723159.pdf?src-supplier=Digi-Key, ComponentLink10URL=https://datasheet.ciiva.com/25723/cl31a107mqhnnne-25723159.pdf?src-supplier=Digi-Key, ComponentLink11Description=https://datasheet.ciiva.com/16437/cl31a107mqhnnne-16437212.pdf?src-supplier=Future+Electronics, ComponentLink11URL=https://datasheet.ciiva.com/16437/cl31a107mqhnnne-16437212.pdf?src-supplier=Future+Electronics, ComponentLink12Description=https://datasheet.ciiva.com/15195/getdatasheetpartid-358449-15195997.pdf?src-supplier=Verical, ComponentLink12URL=https://datasheet.ciiva.com/15195/getdatasheetpartid-358449-15195997.pdf?src-supplier=Verical, ComponentLink13Description=https://datasheet.ciiva.com/29201/452463-da-01-en-vs-kondensator-1206-29201265.pdf?src-supplier=Conrad, ComponentLink13URL=https://datasheet.ciiva.com/29201/452463-da-01-en-vs-kondensator-1206-29201265.pdf?src-supplier=Conrad, ComponentLink14Description=https://datasheet.ciiva.com/20173/71-0886-20173093.pdf?src-supplier=Rapid+Electronics, ComponentLink14URL=https://datasheet.ciiva.com/20173/71-0886-20173093.pdf?src-supplier=Rapid+Electronics, Contact Plating=Tin, Depth=1.25mm, Dissipation Factor=0.1%, Height=1.25mm, Lead Free="Lead Free", Length=2mm, Manufacturer Part Number=GRM21BR60G107ME15L, Material=Ceramic, Mount="Surface Mount", Packaging="Tape and Reel", Pricing 1="1=1.07000, 10=0.84100, 100=0.63070, 500=0.47656, 1000=0.42049 (USD)", Pricing 2="1=1.10000, 10=0.86800, 100=0.65120, 500=0.49204, 1000=0.43415 (USD)", Pricing 3="1=0.62000, 10=0.43900, 100=0.28930, 500=0.21430, 1000=0.18216 (USD)", Radiation Hardening=No, REACH SVHC="No SVHC", RoHS=Yes, Stock 2=30548, Supplier 1=Digi-Key, Supplier 2=Digi-Key, Supplier 3=Digi-Key, Supplier Part Number 2=490-7216-1-ND, Supplier Part Number 3=1276-1782-6-ND, Termination=SMD/SMT, Thickness=0.057inch, Voltage Rating=4V, Voltage Rating (DC)=4V, Weight=0.000335oz, Width=0.049inch
CAN: "FEMALE DB9 D-SUBMINIATURE CONNECTOR, CURRENT RATING 3A, VOLTAGE RATING 250VAC", Color=Black, Current Rating=3A, Manufacturer=Assmann, Max Operating Temperature=125°C, Max Supply Voltage (AC)=250V, Min Operating Temperature=-55°C, Package Quantity=90, Supplier Part Number 1=AE10921-ND, Category="D-Sub Connectors", ComponentLink1Description=https://datasheet.ciiva.com/26927/getdatasheetpartid-755627-26927441.pdf?src-supplier=Verical, ComponentLink1URL=https://datasheet.ciiva.com/26927/getdatasheetpartid-755627-26927441.pdf?src-supplier=Verical, Connector Type=D-Sub,Receptacle,Signal, Contact Material=Brass, Contact Plating=Gold, Depth=18.6mm, Housing Material=PBT, Lead Free="Lead Free", Length=30.81mm, Manufacturer Part Number=A-DF09A/KG-T2S, Mount="Through Hole", Number of Ports=1, Number of Positions=9, Number of Rows=2, Number of Terminals=9, Orientation="Right Angle", Packaging=Tray, Radiation Hardening=No, RoHS=Yes, Stock 1=18258, Supplier 1=Digi-Key, Termination=Solder
D0.1: library part SD05T1G, "TVS DIODE 5V 9.8V SOD323", Breakdown Voltage=6.75V, Capacitance=350pF, Case/Package=SOD-323-2, Clamping Voltage=14.5V, Leakage Current=10uA, Manufacturer="ON Semiconductor", Max Breakdown Voltage=7.3V, Max Operating Temperature=150°C, Max Output Current=24A, Max Power Dissipation=200mW, Min Breakdown Voltage=6.2V, Min Operating Temperature=-55°C, Operating Supply Voltage=5V, Package Quantity=1, Peak Pulse Power=350W, Power Line Protection=No, Supplier Part Number 1=SD05T1GOSCT-ND, Test Current=1mA, Category="Circuit Protection", ComponentLink1Description=https://datasheet.ciiva.com/4507/sd05t1-d-241634-4507873.pdf?src-supplier=Mouser, ComponentLink1URL=https://datasheet.ciiva.com/4507/sd05t1-d-241634-4507873.pdf?src-supplier=Mouser, ComponentLink2Description=https://datasheet.ciiva.com/16200/sd05t1-d-16200994.pdf?src-supplier=Future+Electronics, ComponentLink2URL=https://datasheet.ciiva.com/16200/sd05t1-d-16200994.pdf?src-supplier=Future+Electronics, ComponentLink3Description=https://datasheet.ciiva.com/15143/getdatasheetpartid-117154-15143559.pdf?src-supplier=Verical, ComponentLink3URL=https://datasheet.ciiva.com/15143/getdatasheetpartid-117154-15143559.pdf?src-supplier=Verical, ComponentLink4Description=https://datasheet.ciiva.com/30478/0900766b81250bd7-30478714.pdf?src-supplier=RSComponents, ComponentLink4URL=https://datasheet.ciiva.com/30478/0900766b81250bd7-30478714.pdf?src-supplier=RSComponents, ComponentLink5Description=https://datasheet.ciiva.com/339/sd05t1-d-339830.pdf?src-supplier=Digi-Key, ComponentLink5URL=https://datasheet.ciiva.com/339/sd05t1-d-339830.pdf?src-supplier=Digi-Key, ComponentLink6Description=https://datasheet.ciiva.com/339/sd05t1-d-339831.pdf?src-supplier=Digi-Key, ComponentLink6URL=https://datasheet.ciiva.com/339/sd05t1-d-339831.pdf?src-supplier=Digi-Key, ComponentLink7Description=https://datasheet.ciiva.com/11193/sd05t1-d-11193467.pdf?src-supplier=Avnet, ComponentLink7URL=https://datasheet.ciiva.com/11193/sd05t1-d-11193467.pdf?src-supplier=Avnet, ComponentLink8Description=https://datasheet.ciiva.com/22637/1878253-22637228.pdf?src-supplier=Element14, ComponentLink8URL=https://datasheet.ciiva.com/22637/1878253-22637228.pdf?src-supplier=Element14, ComponentLink9Description=https://datasheet.ciiva.com/25956/sd05t1-d-25956638.pdf?src-supplier=Avnet+Europe, ComponentLink9URL=https://datasheet.ciiva.com/25956/sd05t1-d-25956638.pdf?src-supplier=Avnet+Europe, Composition=Zener, Contact Plating=Tin, Depth=1.25mm, Direction=Unidirectional, Element Configuration=Single, ESD Protection=Yes, Height=1mm, Lead Free="Lead Free", Length=1.7mm, Manufacturer Part Number=SD05T1G, Max Reverse Leakage Current=10uA, Max Surge Current=24A, Number of Elements=1, Number of Pins=2, Number of Unidirectional Channels=1, Packaging="Tape and Reel", Peak Pulse Current=24A, Polarity=Unidirectional, Power Dissipation=350W, Pricing 1="1 = 0.49000, 10 = 0.36500, 100 = 0.20680, 500 = 0.13698, 1000 = 0.10502 (USD)", Radiation Hardening=No, REACH SVHC="No SVHC", Reverse Breakdown Voltage=6.2V, Reverse Standoff Voltage=5V, RoHS=Yes, Stock 1=61559, Supplier 1=Digi-Key, Termination=SMD/SMT, Voltage Rating (DC)=5V, Width=1.35mm, Working Voltage=5V
D0.2: library part CDSOD323-T03S, "ESD Suppressor TVS ±30kV 2-Pin SOD-323 T/R", Breakdown Voltage=4V, Capacitance=500pF, Case/Package=SOD-323-2, Clamping Voltage=10.9V, Leakage Current=125uA, Manufacturer=Bourns, Max Operating Temperature=150°C, Max Power Dissipation=500W, Max Surge Current=43A, Min Operating Temperature=-55°C, Operating Supply Voltage=3.3V, Package Quantity=3000, Power Line Protection=No, Supplier Part Number 1=CDSOD323-T03SCT-ND, Category="Circuit Protection", ComponentLink1Description=https://datasheet.ciiva.com/22685/1671000-22685541.pdf?src-supplier=Element14, ComponentLink1URL=https://datasheet.ciiva.com/22685/1671000-22685541.pdf?src-supplier=Element14, ComponentLink2Description=https://datasheet.ciiva.com/6575/cdsod323-txxsc-6575941.pdf?src-supplier=Digi-Key, ComponentLink2URL=https://datasheet.ciiva.com/6575/cdsod323-txxsc-6575941.pdf?src-supplier=Digi-Key, ComponentLink3Description=https://datasheet.ciiva.com/11193/cdsod323-txxsc-11193742.pdf?src-supplier=Avnet, ComponentLink3URL=https://datasheet.ciiva.com/11193/cdsod323-txxsc-11193742.pdf?src-supplier=Avnet, Composition=Zener, Contact Plating=Tin, Depth=1.45mm, Direction=Unidirectional, Element Configuration=Single, Length=1.9mm, Manufacturer Part Number=CDSOD323-T03S, Min Breakdown Voltage=4V, Mount="Surface Mount", Number of Channels=1, Number of Pins=2, Number of Unidirectional Channels=1, Packaging="Tape and Reel", Peak Pulse Current=43A, Peak Pulse Power=500W, Polarity=Unidirectional, Pricing 1="1 = 0.72000, 10 = 0.60600, 25 = 0.53000, 100 = 0.45420, 250 = 0.39368, 500 = 0.33310, 1000 = 0.25740 (USD)", Radiation Hardening=No, REACH SVHC="No SVHC", Reverse Standoff Voltage=3.3V, RoHS=Yes, Stock 1=99362, Supplier 1=Digi-Key, Termination=SMD/SMT, Working Voltage=3.3V
D2.1 D2.2: library part 150060RS75000, "WURTH ELEKTRONIK - 150060RS75000 - LED, Red, 625 nm, 2 V, 30 mA, 250 mcd RoHS Compliant: Yes", Case Code (Imperial)=0603, Case Code (Metric)=1608, Color=Red, Forward Current=30mA, Forward Voltage=2V, Manufacturer="Wurth Electronics", Max Operating Temperature=85°C, Min Operating Temperature=-40°C, Package Quantity=1, Supplier Part Number 1=732-4978-1-ND, Test Current=20mA, Case/Package=0603, Category=LEDs, ComponentLink1Description=https://datasheet.ciiva.com/29563/150060rs75000-29563040.pdf?src-supplier=Digi-Key, ComponentLink1URL=https://datasheet.ciiva.com/29563/150060rs75000-29563040.pdf?src-supplier=Digi-Key, ComponentLink2Description=https://datasheet.ciiva.com/29279/759428-da-01-en-chipled-0603-w-kl-rot-150060rs75000-29279196.pdf?src-supplier=Conrad, ComponentLink2URL=https://datasheet.ciiva.com/29279/759428-da-01-en-chipled-0603-w-kl-rot-150060rs75000-29279196.pdf?src-supplier=Conrad, Dominant Wavelength=625nm, Height=0.7mm, Length=1.6mm, Lens Style=Clear,Rectangular, Luminous Intensity=250mcd, Manufacturer Part Number=150060RS75000, Mount="Surface Mount", Packaging="Cut Tape", REACH SVHC=Unknown, RoHS=Yes, Stock 1=19381, Supplier 1=Digi-Key, Viewing Angle=140°, Wavelength=625nm, Width=0.8mm
D2.3 D2.4: library part 150060VS75000, "WURTH ELEKTRONIK - 150060VS75000 - LED, Grün, Oberflächenmontage, 603, 30 mA, 2 V, 570 nm", Case Code (Imperial)=0603, Case Code (Metric)=1608, Color=Green, Forward Current=30mA, Forward Voltage=2V, Manufacturer="Wurth Electronics", Max Operating Temperature=85°C, Min Operating Temperature=-40°C, Package Quantity=1, Supplier Part Number 1=732-4980-1-ND, Test Current=20mA, Case/Package=0603, Category=LEDs, ComponentLink1Description=https://datasheet.ciiva.com/29562/150060vs75000-29562919.pdf?src-supplier=Digi-Key, ComponentLink1URL=https://datasheet.ciiva.com/29562/150060vs75000-29562919.pdf?src-supplier=Digi-Key, Dominant Wavelength=570nm, Height=0.7mm, Length=1.6mm, Lens Style=Clear,Rectangular, Luminous Intensity=40mcd, Manufacturer Part Number=150060VS75000, Mount="Surface Mount", Number of Pins=2, Packaging="Tape and Reel", REACH SVHC=Unknown, RoHS=Yes, Stock 1=29022, Supplier 1=Digi-Key, Viewing Angle=140°, Wavelength=570nm, Width=0.8mm
F0.1: library part 0031.7701.11, "SCHURTER - 0031.7701.11 - FUSE HOLDER, PCB MOUNT", Color=White, Current Rating=5A, Manufacturer=Schurter, Max Operating Temperature=85°C, Min Operating Temperature=-40°C, Package Quantity=100, Supplier Part Number 1=486-1991-ND, Voltage=125V, Body Material=Thermoplastic, Category="Circuit Protection", ComponentLink1Description=https://datasheet.ciiva.com/1270/typ-omh-125-1270896.pdf?src-supplier=Element14, ComponentLink1URL=https://datasheet.ciiva.com/1270/typ-omh-125-1270896.pdf?src-supplier=Element14, ComponentLink2Description=https://datasheet.ciiva.com/7496/typ-omh-125-7496724.pdf?src-supplier=Digi-Key, ComponentLink2URL=https://datasheet.ciiva.com/7496/typ-omh-125-7496724.pdf?src-supplier=Digi-Key, ComponentLink3Description=https://datasheet.ciiva.com/16215/typ-omh-125-16215096.pdf?src-supplier=Onlinecomponents.com, ComponentLink3URL=https://datasheet.ciiva.com/16215/typ-omh-125-16215096.pdf?src-supplier=Onlinecomponents.com, ComponentLink4Description=https://datasheet.ciiva.com/30058/73typ-omh-125-30058618.pdf?src-supplier=Onlinecomponents.com, ComponentLink4URL=https://datasheet.ciiva.com/30058/73typ-omh-125-30058618.pdf?src-supplier=Onlinecomponents.com, ComponentLink5Description=https://datasheet.ciiva.com/14128/awomh125-data-e-14128364.pdf?src-supplier=Distrelec, ComponentLink5URL=https://datasheet.ciiva.com/14128/awomh125-data-e-14128364.pdf?src-supplier=Distrelec, ComponentLink6Description=https://datasheet.ciiva.com/1221/1925349-1221826.pdf?src-supplier=Newark, ComponentLink6URL=https://datasheet.ciiva.com/1221/1925349-1221826.pdf?src-supplier=Newark, ComponentLink7Description=https://datasheet.ciiva.com/3014/typ-omh-125-3014522.pdf?src-supplier=Avnet, ComponentLink7URL=https://datasheet.ciiva.com/3014/typ-omh-125-3014522.pdf?src-supplier=Avnet, ComponentLink8Description=https://datasheet.ciiva.com/4480/typ-omh-125-4480427.pdf?src-supplier=Mouser, ComponentLink8URL=https://datasheet.ciiva.com/4480/typ-omh-125-4480427.pdf?src-supplier=Mouser, ComponentLink9Description=https://datasheet.ciiva.com/17405/typ-omh-125-17405484.pdf?src-supplier=Avnet+Europe, ComponentLink9URL=https://datasheet.ciiva.com/17405/typ-omh-125-17405484.pdf?src-supplier=Avnet+Europe, ComponentLink10Description=Digikey, ComponentLink10URL=https://www.digikey.ca/product-detail/en/schurter-inc/0031.7701.11/486-1991-ND/640027, Contact Material="Copper Alloy", Contact Plating=Tin, Depth=5.2mm, Fuse Current=5A, Height=6mm, Illumination Type=Illuminated, Lead Free="Lead Free", Length=12mm, Manufacturer Part Number=0031.7701.11, Material=Tin, Mount="Surface Mount", Number of Circuits=1, Number of Poles=1, Packaging=Bulk, Pricing 1="1 = 1.39000, 50 = 1.03400, 100 = 0.93100, 500 = 0.70300, 1000 = 0.52080 (USD)", Radiation Hardening=No, REACH SVHC="No SVHC", RoHS=Yes, Stock 1=11381, Supplier 1=Digi-Key, Terminal Material=Brass, Termination=SMD/SMT, Voltage Rating=125V, Voltage Rating (AC)=125V, Voltage Rating (DC)=125V, Weight=0.016932oz, Width=5.2mm
"GPS CONN": "Micro-fit 3.0 8pos right-angle", Case/Package=SMC, Color=Black, Contact Resistance=10mR, Current Rating=5A, Flammability Rating="UL94 V-0", Insulation Resistance=1GR, Manufacturer=Molex, Manufacturer Part Number=43045-0800, Max Operating Temperature=105°C, Max Voltage Rating (DC)=250.25kV, Min Operating Temperature=-40°C, Package Quantity=1440, Supplier Part Number 1=WM1816-ND, Voltage Rating=600V, Voltage Rating (AC)=250V, Approvals=UL,CSA,TUV, Category="Headers and Wire Housings", ComponentLink1Description=https://datasheet.ciiva.com/5158/0430450800-pcb-headers-142625-5158817.pdf?src-supplier=Mouser, ComponentLink1URL=https://datasheet.ciiva.com/5158/0430450800-pcb-headers-142625-5158817.pdf?src-supplier=Mouser, ComponentLink2Description=https://datasheet.ciiva.com/7683/27645-7683683.pdf?src-supplier=Element14, ComponentLink2URL=https://datasheet.ciiva.com/7683/27645-7683683.pdf?src-supplier=Element14, ComponentLink3Description=https://datasheet.ciiva.com/11751/0900766b80027348-11751142.pdf?src-supplier=RSComponents, ComponentLink3URL=https://datasheet.ciiva.com/11751/0900766b80027348-11751142.pdf?src-supplier=RSComponents, ComponentLink4Description=https://datasheet.ciiva.com/30198/267770430450800-pcb-headers-30198875.pdf?src-supplier=Onlinecomponents.com, ComponentLink4URL=https://datasheet.ciiva.com/30198/267770430450800-pcb-headers-30198875.pdf?src-supplier=Onlinecomponents.com, ComponentLink5Description=https://datasheet.ciiva.com/19462/883536-19462164.pdf?src-supplier=Jameco, ComponentLink5URL=https://datasheet.ciiva.com/19462/883536-19462164.pdf?src-supplier=Jameco, ComponentLink6Description=https://datasheet.ciiva.com/14155/04402310-14155206.pdf?src-supplier=Distrelec, ComponentLink6URL=https://datasheet.ciiva.com/14155/04402310-14155206.pdf?src-supplier=Distrelec, ComponentLink7Description=https://datasheet.ciiva.com/16657/0430450800-pcb-headers-16657964.pdf?src-supplier=Avnet+Europe, ComponentLink7URL=https://datasheet.ciiva.com/16657/0430450800-pcb-headers-16657964.pdf?src-supplier=Avnet+Europe, ComponentLink8Description=https://datasheet.ciiva.com/10087/0430450800-pcb-headers-10087853.pdf?src-supplier=Avnet, ComponentLink8URL=https://datasheet.ciiva.com/10087/0430450800-pcb-headers-10087853.pdf?src-supplier=Avnet, ComponentLink9Description=https://datasheet.ciiva.com/1443/1850016-1443537.pdf?src-supplier=Element14, ComponentLink9URL=https://datasheet.ciiva.com/1443/1850016-1443537.pdf?src-supplier=Element14, Contact Material=Brass,Tin, Contact Plating=Tin, Depth=12.2mm, Diameter=3mm, Gender=Male, Glow Wire Compliant=Compliant, Halogen Free="Low Halogen", Height=8.77mm, Housing Color=Black, Housing Material=Thermoplastic, Lead Free="Lead Free", Length=16.15mm, Material=Polyester, Max Current Rating=5A, Mount="Through Hole", Number of Circuits=8, Number of Contacts=8, Number of Poles=8, Number of Positions=8, Number of Rows=2, Orientation="Right Angle", Packaging=Tray, Pitch=3mm, Radiation Hardening=No, REACH SVHC=Unknown, RoHS=Yes, Row Spacing=3mm, Stock 1=7880, Supplier 1=Digi-Key, Termination=Solder, Voltage Rating (DC)=250V, Working Voltage=250V
J0.1 J0.2 J0.3: library part 0901200762, "CONN HEADER VERT 2POS 2.54MM", Color=Black, Contact Resistance=20mR, Manufacturer=Molex, Max Operating Temperature=125°C, Max Voltage Rating (AC)=350V, Min Operating Temperature=-55°C, Supplier Part Number 1=WM8084-ND, Category=Connectors, ComponentLink1Description=https://datasheet.ciiva.com/711/901200762-sd-711939.pdf?src-supplier=Digi-Key, ComponentLink1URL=https://datasheet.ciiva.com/711/901200762-sd-711939.pdf?src-supplier=Digi-Key, ComponentLink2Description=https://datasheet.ciiva.com/3117/0901200762-pcb-headers-3117809.pdf?src-supplier=Avnet, ComponentLink2URL=https://datasheet.ciiva.com/3117/0901200762-pcb-headers-3117809.pdf?src-supplier=Avnet, Connector Type="Male Pin", Contact Material=Brass, Contact Mating Length=0.266inch, Contact Plating=Gold, Depth=2.54mm, Gender=Male, Housing Color=Black, Housing Material=Polyester, Length=5.08mm, Manufacturer Part Number=0901200762, Max Voltage Rating (DC)=350V, Mount="Through Hole", Number of Contacts=2, Number of Positions=2, Number of Rows=1, Orientation=Straight, Packaging=Bulk, Pitch=2.54mm, Pricing 1="1 = 0.560000, 10 = 0.530000, 100 = 0.406000, 500 = 0.353000, 1000 = 0.291230, 5000 = 0.255930, 10000 = 0.238280 (USD)", RoHS=Yes, Stock 1=37733, Supplier 1=Digi-Key, Termination=Solder